# Altium PCB senkron_buck.PcbDoc (part 1 of 3)
Units mm, origin at the board's own origin, x right, y up, seen from the top; angles counter-clockwise.
Board outline 100 x 70 mm, 4 copper layers (Top Layer, L2_GND, L3_PWR, Bottom Layer), stack 1.586 mm thick; 52 components, 27 nets, 143 pads, 815 vias.
Unrouted connection lines stored in the file: 34.
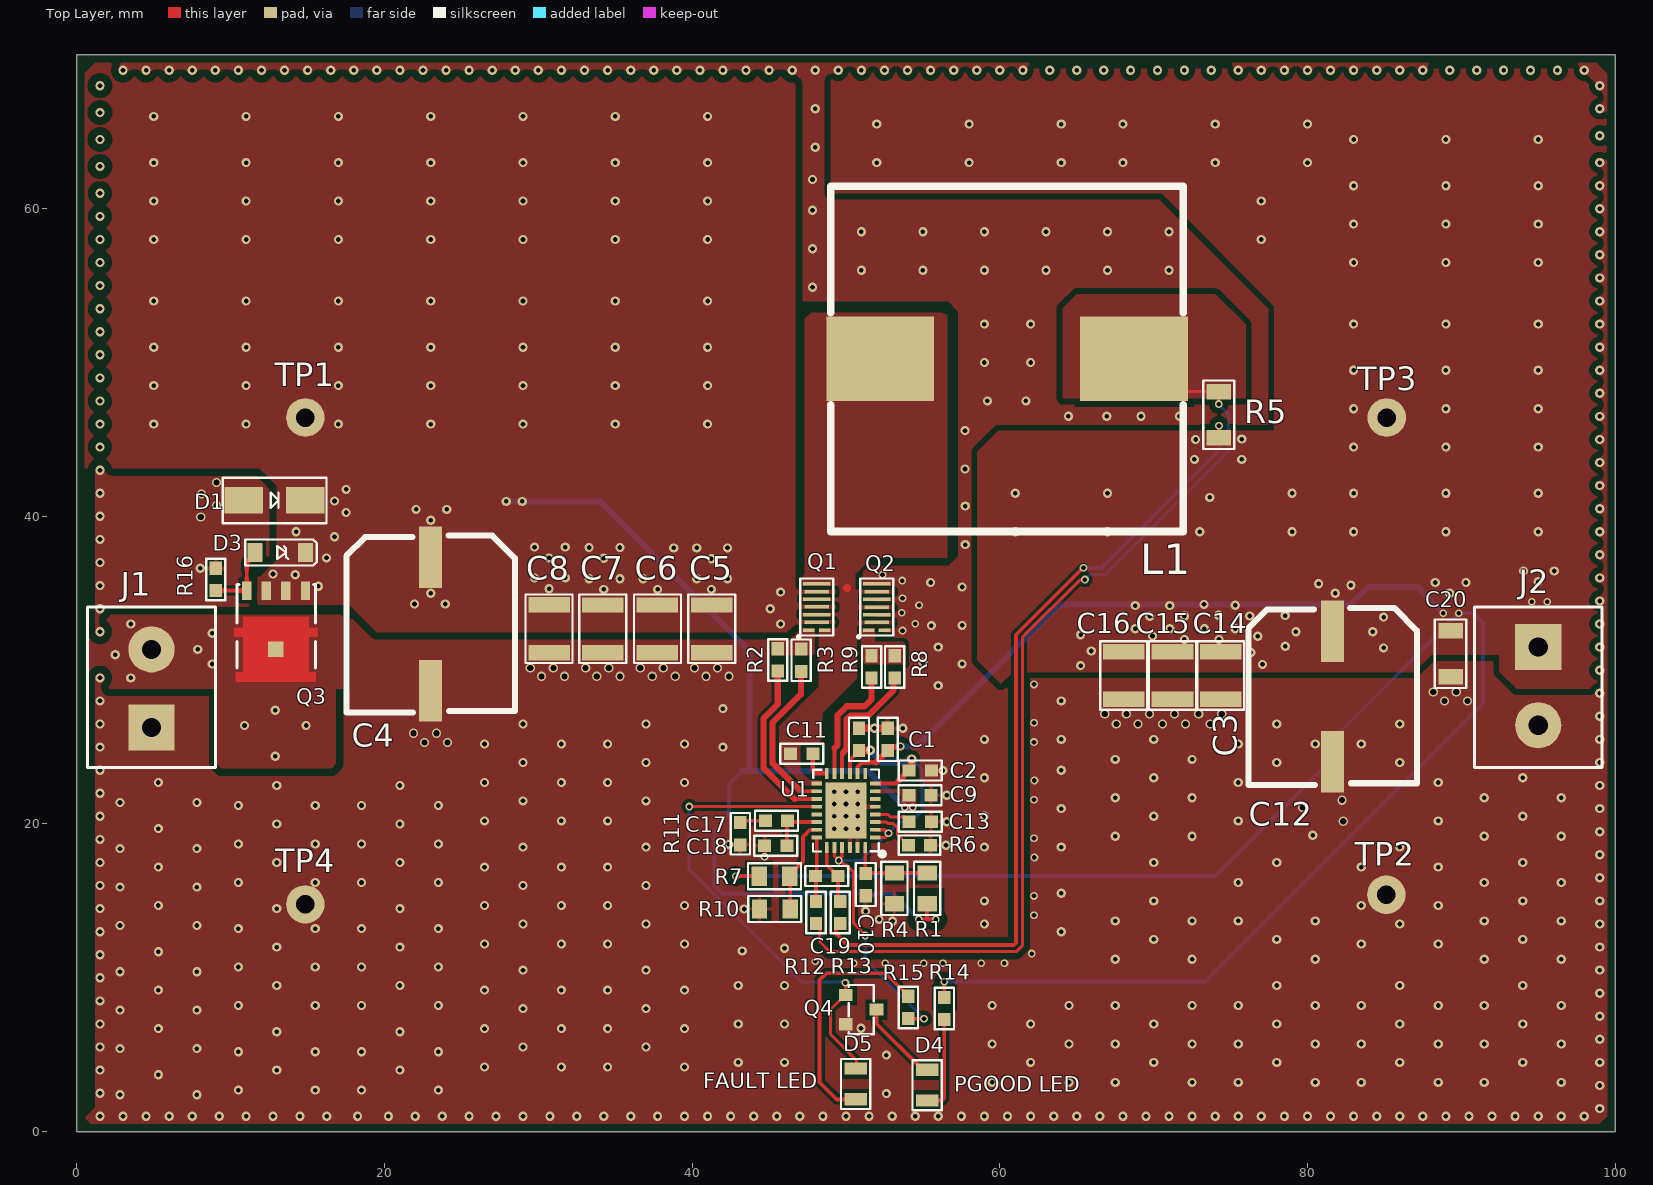
[diagram p0: Top Layer view]
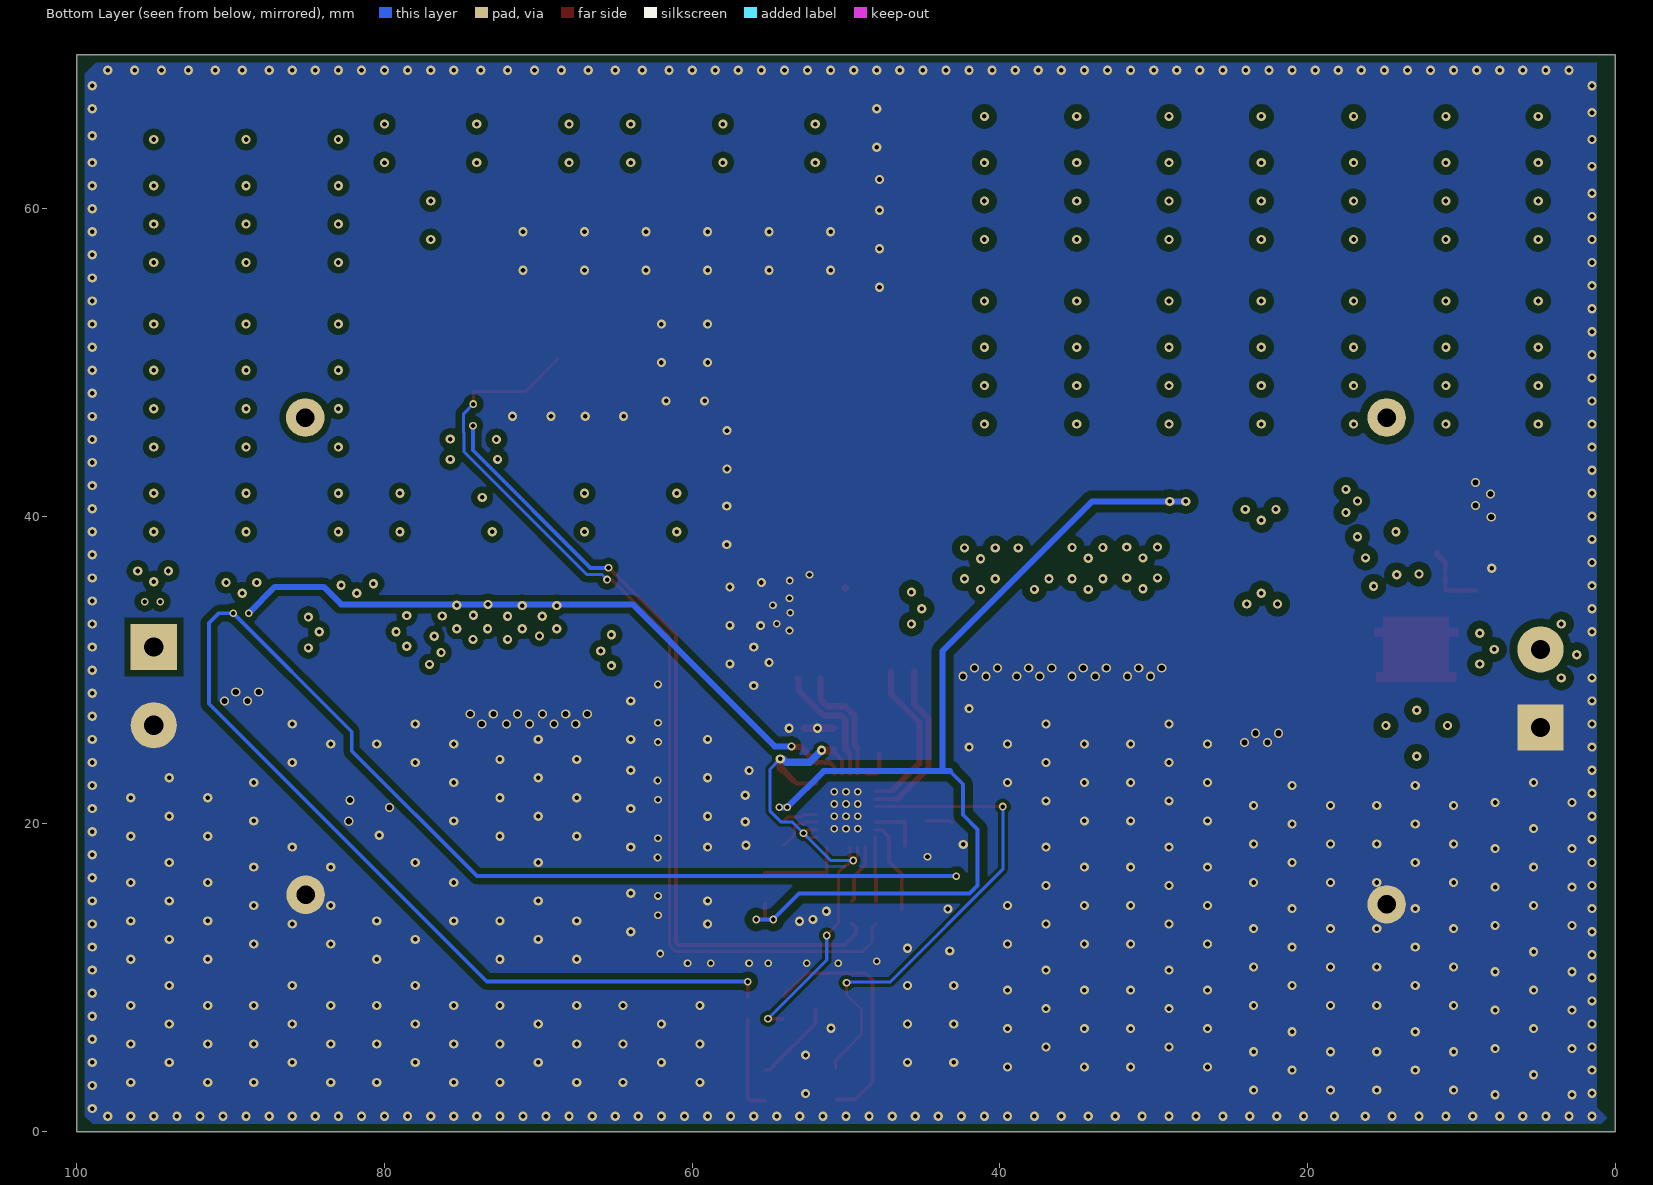
[diagram p1: Bottom Layer view, seen from below]
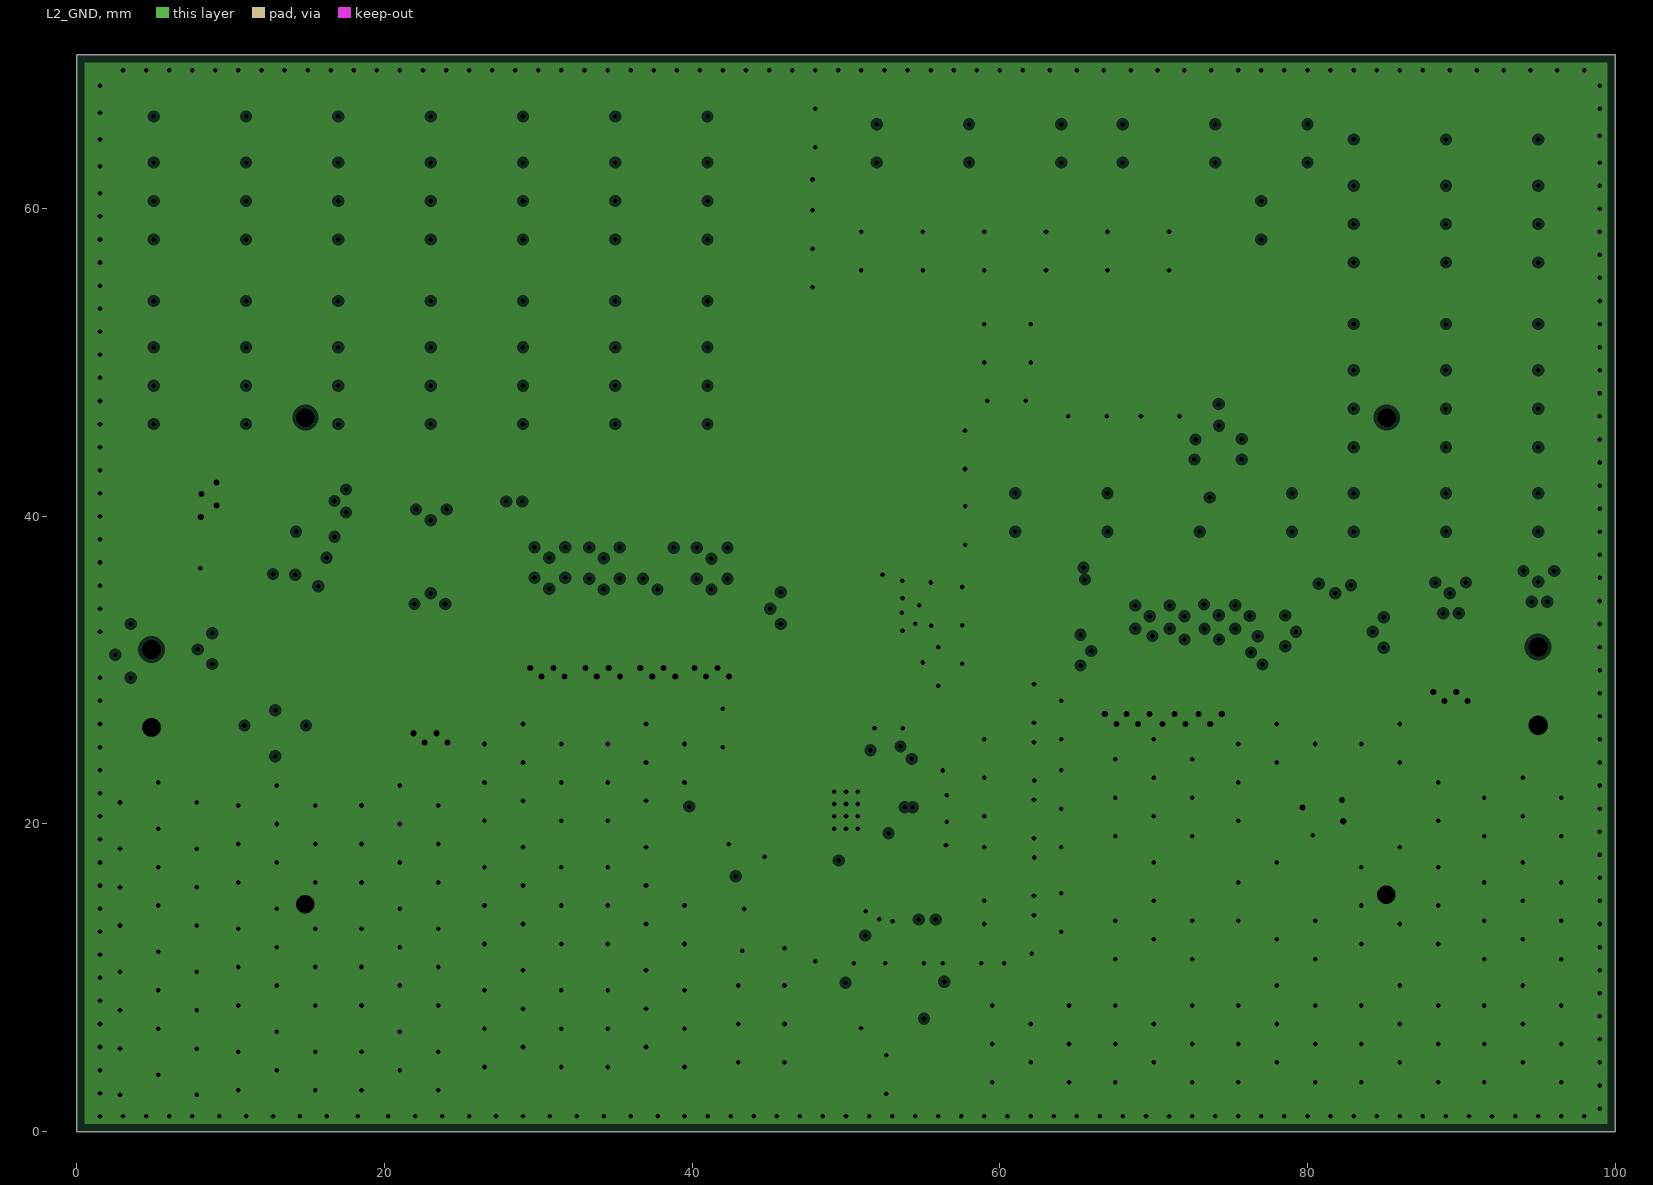
[diagram p2: L2_GND, clearances drawn from the general rule]
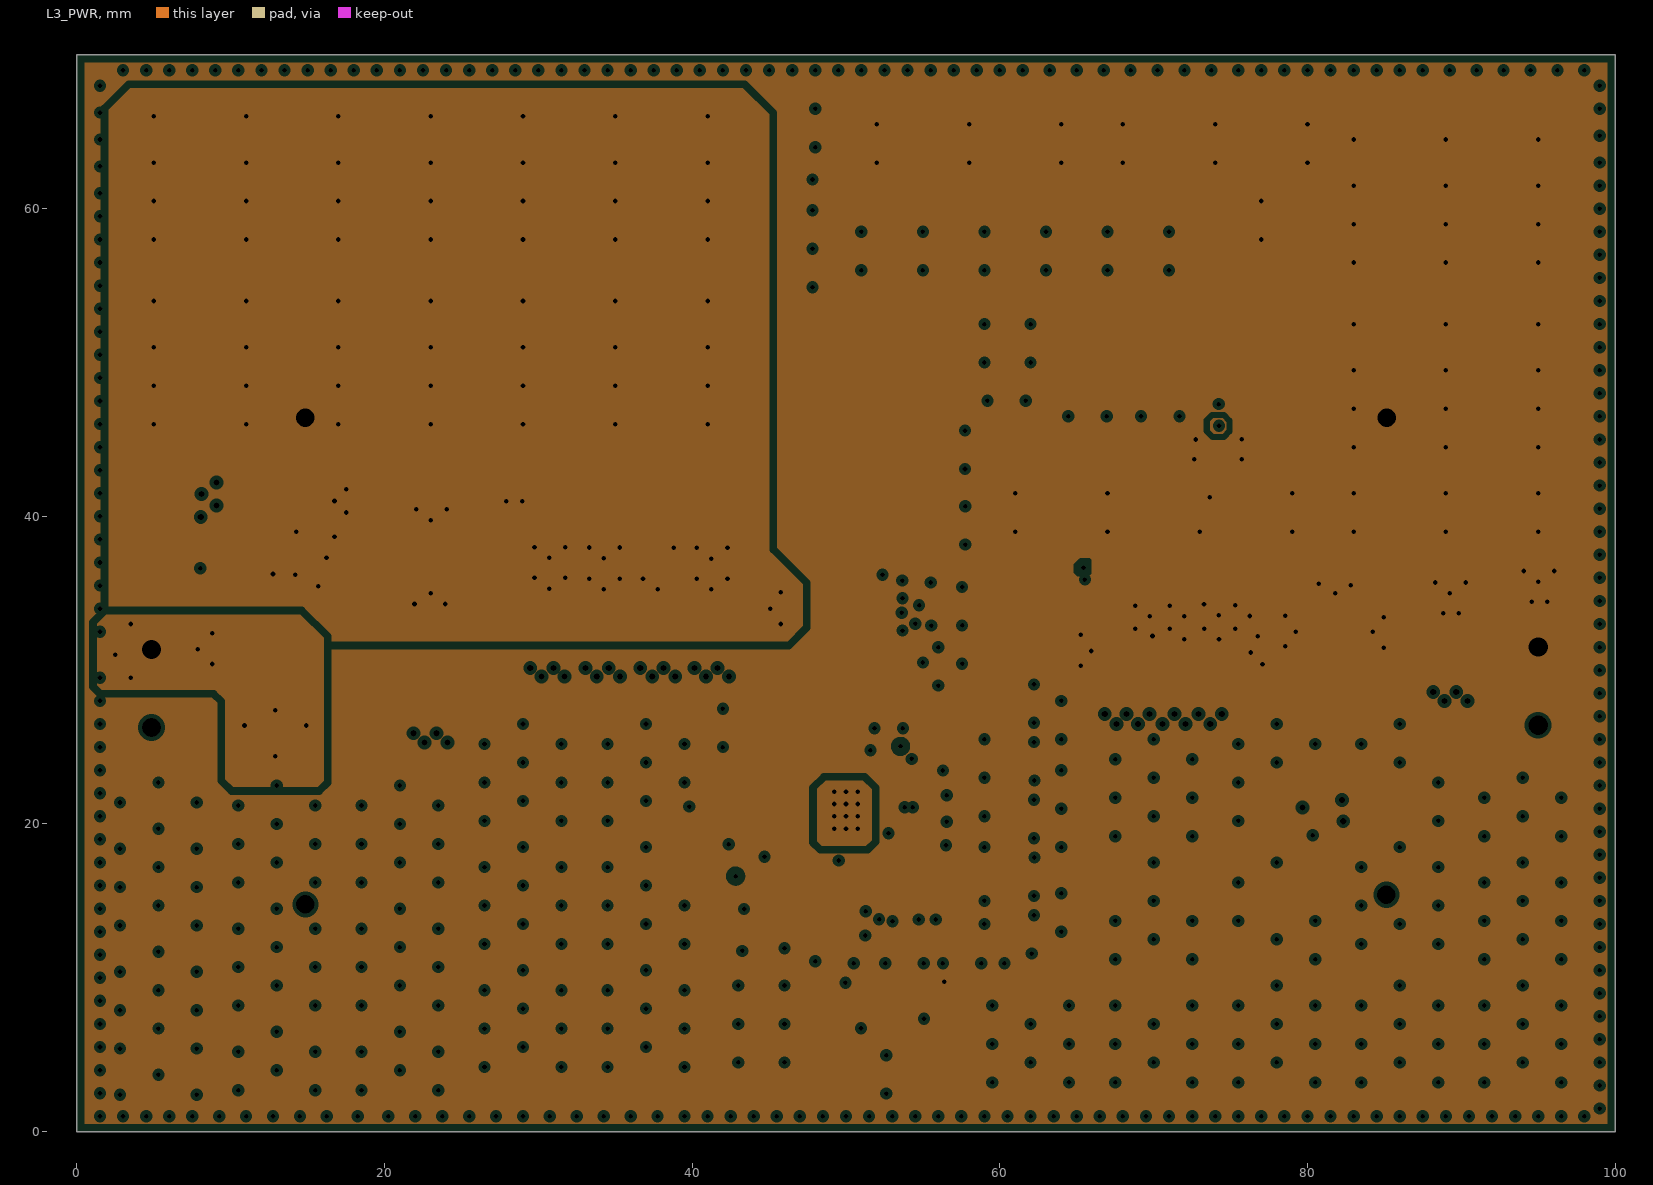
[diagram p3: L3_PWR, clearances drawn from the general rule]
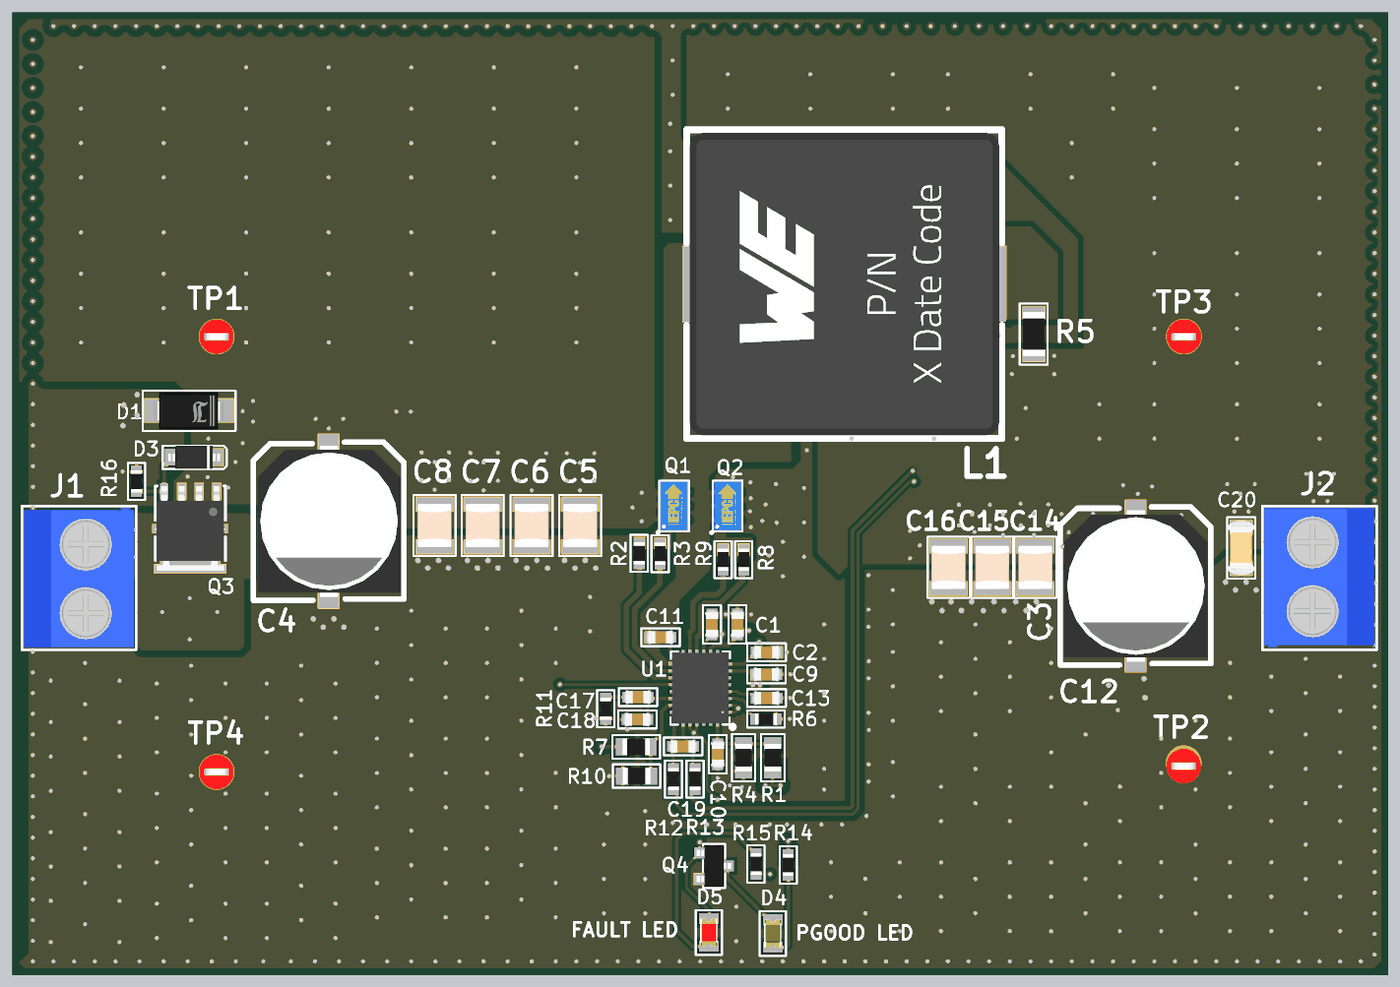
[diagram p4: 3D render of the assembled board from above, using the file's embedded part models]

## Layer stack, top to bottom
Top Solder: solder mask 0.0102, Solder Resist, Dk 3.5
Top Layer: signal copper 0.035
Dielectric 2: prepreg 0.2104, PP-006, Dk 4.1
L2_GND: plane copper 0.0152, net GND
Dielectric 1: dielectric 1.065, FR-4, Dk 4.8
L3_PWR: plane copper 0.0152, net VOUT
Dielectric 3: prepreg 0.2104, PP-006, Dk 4.1
Bottom Layer: signal copper 0.035
Bottom Solder: solder mask 0.0102, Solder Resist, Dk 3.5

## Board outline
0,0 100,0 100,70 0,70

## Design rules (kind name [scope] priority, off if disabled: settings)
BoardOutlineClearance [All] p1: gap=0.5 ignorepadtopadclearanceinfootprint=FALSE
Clearance ClearanceNETL1_2-GND [InNet('NetL1_2') vs InNet('GND')] p1: gap=0.4 ignorepadtopadclearanceinfootprint=TRUE except(0: Arc-Hole Track-Hole SMDPad-Hole THPad-Hole Via-Hole Fill-Hole Poly-Hole Region-Hole Text-Hole)
Clearance ClearanceVOUT_GND [InNet('VOUT') vs InNet('GND')] p2: gap=0.4 ignorepadtopadclearanceinfootprint=TRUE except(0: Arc-Hole Track-Hole SMDPad-Hole THPad-Hole Via-Hole Fill-Hole Poly-Hole Region-Hole Text-Hole)
Clearance ClearanceVBAT_GND [InNet('VBAT') vs InNet('GND')] p3: gap=0.5 ignorepadtopadclearanceinfootprint=TRUE except(0: Arc-Hole Track-Hole SMDPad-Hole THPad-Hole Via-Hole Fill-Hole Poly-Hole Region-Hole Text-Hole)
Clearance ClearanceVIN_GND [InNet('GND') vs InNet('VIN')] p4: gap=0.5 ignorepadtopadclearanceinfootprint=TRUE except(0: Arc-Hole Track-Hole SMDPad-Hole THPad-Hole Via-Hole Fill-Hole Poly-Hole Region-Hole Text-Hole)
Clearance Clearance_1 [All] p5: gap=0.254 ignorepadtopadclearanceinfootprint=TRUE except(0: Arc-Hole Track-Hole SMDPad-Hole THPad-Hole Via-Hole Fill-Hole Poly-Hole Region-Hole Text-Hole; 0.2: Arc-Arc Arc-Track Arc-SMDPad Arc-Fill Arc-Poly Arc-Region Track-Track Track-SMDPad Track-Fill Track-Poly Track-Region)
DiffPairsRouting [All] p1: maxlimit=0.254 minlimit=0.15 mostfreqgap=0.15 toplayer_minwidth=0.15 toplayer_maxwidth=0.5 toplayer_prefwidth=0.2 bottomlayer_minwidth=0.15 bottomlayer_maxwidth=0.5 bottomlayer_prefwidth=0.2 maxuncoupledlength=12.7
PlaneClearance [All] p1: clearance=0.25
PlaneConnect [All] p1: planeconnectstyle=Direct reliefexpansion=0.508 reliefentries=4 reliefconductorwidth=0.254 reliefairgap=0.254
PolygonConnect [All] p1: connectstyle=Direct reliefconductorwidth=0.254 reliefentries=4 polygonreliefangle="90 Angle" airgapwidth=0.254
RoutingVias [All] p1: holewidth=0.3 width=0.6 viastyle="Through Hole" minholewidth=0.2 minwidth=0.45 maxholewidth=1 maxwidth=1.5
SilkToSilkClearance [All] p1: silktosilkclearance=0
SolderMaskExpansion [All] p1: expansion=0.05 istentingtop=FALSE
UnRoutedNet [All] p1: checkbadconnections=TRUE
Width [All] p1: maxlimit=10 minlimit=0.15 preferedwidth=0.254
25 further rules are at their usual default settings.

## Components (designator, comment, footprint, x,y, rotation, side; value= is the part's Value field where it differs from the comment)
C1 "1uF" "0603 CAP SER" 52.705,25.502 r0 top value=1µF
C2 "4.7uF" "0603 CAP SER" 54.825,23.475 r270 top value=4.7µF
C3 "4.7uF" "0603 CAP SER" 50.851,25.502 r0 top value=4.7µF
C4 "100uF" "CAP ELEC 12.5X10" 23,33 r270 top
C5 "4.7uF" "1210 CAP SER" 41.275,32.69 r180 top value=4.7µF
C6 "4.7uF" "1210 CAP SER" 37.744,32.69 r180 top value=4.7µF
C7 "4.7uF" "1210 CAP SER" 34.188,32.69 r180 top value=4.7µF
C8 "4.7uF" "1210 CAP SER" 30.694,32.695 r180 top value=4.7µF
C9 "100nF" "0603 CAP SER" 54.813,21.869 r270 top
C10 "100pF" "0603 CAP SER" 51.275,16.061 r180 top
C11 "100nF" "0603 CAP SER" 47.117,24.562 r270 top
C12 "220uF" "CAP ELEC 10x10" 81.636,28.296 r270 top
C13 "100nF" "0603 CAP SER" 54.825,20.147 r270 top
C14 "22uF" "1210 CAP SER" 74.35,29.65 r180 top value=22µF
C15 "22uF" "1210 CAP SER" 71.225,29.65 r180 top value=22µF
C16 "22uF" "1210 CAP SER" 68.05,29.65 r180 top value=22µF
C17 "4.7nF" "0603 CAP SER" 45.483,20.213 r90 top
C18 "100pF" "0603 CAP SER" 45.433,18.588 r90 top
C19 "1nF" "0603 CAP SER" 48.75,16.625 r270 top
C20 "10uF" "1206 CAP SER" 89.306,31.064 r180 top value=10µF
D1 "SMAJ40A-HT" "DO-214AC SMA" 12.853,41.05 r0 top
D3 "MMSZ15V-HT" SOD-123 13.213,37.65 r0 top
D4 "LED SMD 0805 GREEN 18-45mcd 140° WATER CLEAR" "LED 0805 GREEN" 55.275,3.025 r180 top
D5 "LED SMD 0805 RED 45~112mcd 120C" "LED 0805 RED" 50.625,3.1 r180 top
J1 "2P Screw Terminal Block 2 pin" "2P Screw Terminal Block 2 pin" 4.85,28.81 r270 top
J2 "2P Screw Terminal Block 2 pin" "2P Screw Terminal Block 2 pin" 95,28.96 r90 top
L1 "10 µH Shielded Drum Core, Wirewound Inductor 21 A 3.4mOhm Nonstandard" "74435581000 INDUCTOR" 60.477,50.241 r90 top value=10µH
Q1 "EPC2218" EPC2218 48.1,34.11 r90 top
Q2 "EPC2218" EPC2218 51.994,34.104 r90 top
Q3 "MOSFET DIS.52A 60V P-CH POWERPAKSO-8" "PowerPAK® SO-8L SINGLE" 12.95,33.263 r180 top
Q4 "PJA3416AE_R1_00001" "SOT-23 MOSFET" 50.987,7.935 r270 top
R1 "412k" "0805 RES" 55.275,15.811 r0 top
R2 "2.2R" "0603 RES" 45.561,30.666 r180 top value=2.2Ω
R3 "1R" "0603 RES" 47.086,30.641 r180 top value=1Ω
R4 "33.2k" "0805 RES" 53.15,15.811 r180 top value=33.2kΩ
R5 "6m" "1206 RES" 74.244,46.609 r0 top
R6 "73.2k" "0603 RES" 54.775,18.622 r270 top
R7 "604k" "0805 RES" 45.35,16.6 r270 top
R8 "1R" "0603 RES" 53.162,30.211 r180 top value=1Ω
R9 "1R" "0603 RES" 51.662,30.211 r180 top value=1Ω
R10 "43.2k" "0805 RES" 45.375,14.475 r90 top value=43.2kΩ
R11 "10k" "0603 RES" 43.133,19.363 r180 top value=10kΩ
R12 "47R" "0603 RES" 48.05,14.25 r0 top value=47Ω
R13 "47R" "0603 RES" 49.625,14.25 r0 top value=47Ω
R14 "2.2k" "0603 RES" 56.391,8.007 r180 top value=2.2kΩ
R15 "1k ohm" "0603 RES" 54.051,8.077 r0 top value=1kR
R16 "100k" "0603 RES" 9.028,35.9 r0 top value=100kR
TP1 "Test Point" "Test Point THT"#1 14.855,46.425 r0 top
TP2 "Test Point" "Test Point THT"#2 85.13,15.2 r0 top
TP3 "Test Point" "Test Point THT"#3 85.15,46.425 r0 top
TP4 "Test Point" "Test Point THT"#3 14.853,14.775 r0 top
U1 "LTC7891" "28-Lead Plastic Side Wettable QFN (4mm × 5mm)" 50,20.875 r90 top

## Footprints (in the part's own frame and the unit in brackets; to place one, negate y for a bottom-side part, rotate by r counter-clockwise, add the part's x,y. Pads: shape width x height; smd on the part's side, far side on the other; paste and mask are expansions set on the pad)
"2P Screw Terminal Block 2 pin" [mm]
  rect 3x3 hole 1.25 mask+0.05: 1(2.54,0)
  round 3 hole 1.25 mask+0.05: 2(-2.54,0)
  silkscreen extent -5.3,-4.15 5.15,4.15, body extent -5.15,-4 5,4, height 10.05
"28-Lead Plastic Side Wettable QFN (4mm × 5mm)" [mm]
  rect 0.25x0.7 smd mask+0.05: 1(-1.75,-1.9) 2(-1.25,-1.9) 3(-0.75,-1.9) 4(-0.25,-1.9) 5(0.25,-1.9) 6(0.75,-1.9) 7(1.25,-1.9) 8(1.75,-1.9) 15(1.75,1.9) 16(1.25,1.9) 17(0.75,1.9) 18(0.25,1.9) 19(-0.25,1.9) 20(-0.75,1.9) 21(-1.25,1.9) 22(-1.75,1.9)
  rect 0.7x0.25 smd mask+0.05: 9(2.4,-1.25) 10(2.4,-0.75) 11(2.4,-0.25) 12(2.4,0.25) 13(2.4,0.75) 14(2.4,1.25) 23(-2.4,1.25) 24(-2.4,0.75) 25(-2.4,0.25) 26(-2.4,-0.25) 27(-2.4,-0.75) 28(-2.4,-1.25)
  rect 3.65x2.65 smd mask+0.05: 29(0,0)
  silkscreen extent -2.97,-2.5 2.66,2.15, body extent -2.55,-2.04 2.55,2.04, height 0.81
"0603 CAP SER" [mm]
  rect 0.8x0.85 smd mask+0.05: 1(0,0.725) 2(0,-0.725)
  silkscreen extent -0.65,-1.4 0.65,1.4, body extent -0.51,-1.05 0.51,1.05, height 0.84
"0603 RES" [mm]
  rect 0.8x0.85 smd mask+0.05: 1(0,0.725) 2(0,-0.725)
  silkscreen extent -0.63,-1.35 0.63,1.35, body extent -0.4,-0.8 0.4,0.8, height 0.45
"0805 RES" [mm]
  rect 1.25x1 smd mask+0.05: 1(0,1) 2(0,-1)
  silkscreen extent -0.85,-1.73 0.85,1.73, body extent -0.6,-1 0.6,1, height 0.55
"1206 CAP SER" [mm]
  rect 1.6x1 smd mask+0.05: 1(0,1.5) 2(0,-1.5)
  silkscreen extent -1.02,-2.22 1.02,2.22, body extent -0.98,-1.97 0.98,1.97, height 1.4
"1206 RES" [mm]
  rect 1.6x1 smd mask+0.05: 1(0,1.5) 2(0,-1.5)
  silkscreen extent -1.02,-2.22 1,2.22, body extent -0.8,-1.6 0.8,1.6, height 0.5
"1210 CAP SER" [mm]
  rect 2.7x1 smd mask+0.05: 1(0,1.55) 2(0,-1.55)
  silkscreen extent -1.53,-2.22 1.53,2.22, body extent -1.25,-1.6 1.25,1.6, height 2.51
"74435581000 INDUCTOR" [mm]
  rect 5.5x7 smd mask+0.05: 1(0,8.25) 2(0,-8.25)
  silkscreen extent -11.22,-11.45 11.22,11.48, body extent -11,-11.25 11,11.25, height 12
"CAP ELEC 10x10" [mm]
  rect 4x1.5 smd mask+0.05: 1(-4.25,0) 2(4.25,0)
  silkscreen extent -5.75,-5.48 5.75,5.48, body extent -5.5,-5.17 5.5,5.23, height 10.41
"CAP ELEC 12.5X10" [mm]
  rect 4x1.5 smd mask+0.05: 1(-4.35,0) 2(4.35,0)
  silkscreen extent -5.75,-5.48 5.75,5.48, body extent -5.5,-5.17 5.5,5.23, height 10.41
"DO-214AC SMA" [mm] "DO-214AC SMA"
  rect 2.5x1.7 smd mask+0.05: A(-2,0) K(2,0)
  silkscreen extent -3.37,-1.5 3.37,1.45, body extent -2.58,-1.38 2.53,1.32, height 1.96
EPC2218 [mm]
  rect 0.23x0.755 smd mask+0.05: 1(-1.5,0.513) 2(-1.5,-0.512)
  rect 0.23x1.605 smd mask+0.05: 3(-1,0) 5(0,0) 7(1,0)
  rect 0.23x1.78 smd mask+0.05: 4(-0.5,0) 6(0.5,0) 8(1.5,0)
  silkscreen extent -1.98,-1.07 1.85,1.21, body extent -1.75,-0.97 1.75,0.97, height 0.65
"LED 0805 GREEN" [mm]
  rect 1.45x0.8 smd mask+0.05: 1(0,1) 2(0,-1)
  silkscreen extent -0.95,-1.63 0.95,1.63, body extent -0.63,-1.01 0.63,1.01, height 1.1
"LED 0805 RED" [mm]
  rect 1.45x0.8 smd mask+0.05: 1(0,1) 2(0,-1)
  silkscreen extent -0.95,-1.63 0.95,1.63, body extent -0.63,-1.01 0.63,1.01, height 1.1
"PowerPAK® SO-8L SINGLE" [mm]
  rect 1x1 smd mask+0.05: D(0.025,1.913)
  rect 0.6x1.2 smd mask+0.05: G(1.905,-1.912) S(-1.905,-1.912) S(-0.635,-1.912) S(0.635,-1.912)
  Top Layer region: -2.125,-0.212 2.15,-0.212 2.15,0.5 2.75,0.5 2.75,1.1 2.15,1.1 2.15,3.413 2.625,3.413 2.625,4.013 -2.575,4.013 -2.575,3.413 -2.125,3.413 -2.125,1.1 -2.7,1.1 -2.7,0.5 -2.125,0.5
  silkscreen extent -2.55,-2.3 2.55,3.13, body extent -2.56,-2.29 2.56,3.86, height 1.07
SOD-123 [mm]
  rect 0.97x1.22 smd mask+0.05: A(-1.64,0) K(1.64,0)
  silkscreen extent -2.27,-0.85 2.37,0.85, body extent -1.88,-0.85 1.88,0.85, height 1.2
"SOT-23 MOSFET" [mm]
  rect 0.8x0.9 smd mask+0.05: D(0,1) G(-0.95,-1) S(0.95,-1)
  silkscreen extent -1.6,-0.8 1.6,0.82, body extent -1.5,-1.25 1.5,1.25, height 1.1
"Test Point THT"#1 [mm]
  round 2.5 hole 1.2 mask+0.05: 1(-0.002,0)
  body extent -1.26,-1.27 1.26,1.27, height 5.07
"Test Point THT"#2 [mm]
  round 2.5 hole 1.2 mask+0.05: 1(0,0.2)
  body extent -1.26,-1.27 1.26,1.27, height 5.07
"Test Point THT"#3 [mm]
  round 2.5 hole 1.2 mask+0.05: 1(0,0)
  body extent -1.26,-1.27 1.26,1.27, height 5.07

## Part data
C1: library part "Cap Cer 1uF %10  SMD 0603", "Multi Layer Ceramic Capacitor (MLCC)", Case Code (Metric)=1608, Case Code (Imperial)=0603, Dielectric=X7R, Dielectric Material=Ceramic, Manufacturer="Samsung Electro-Mechanics", Manufacturer Part Number=CL10B105KA8NNNC, Max Operating Temperature=125°C, Min Operating Temperature=-55°C, Supplier Part Number=187-CL10B105KA8NNNC, Tolerance=10%, Voltage=25V, Case/Package=0603, Category="Ceramic Capacitors", China RoHS=Compliant, ComponentLink1Description=https://datasheet.octopart.com:443/CL10B105KA8NNNC-Samsung-Electro-Mechanics-datasheet-182019882.pdf?src-supplier=IHS, ComponentLink1URL=https://datasheet.octopart.com:443/CL10B105KA8NNNC-Samsung-Electro-Mechanics-datasheet-182019882.pdf?src-supplier=IHS, ComponentLink2Description=https://datasheet.octopart.com:443/CL10B105KA8NNNC-Samsung-Electro-Mechanics-datasheet-106547815.pdf?src-supplier=Upverter, ComponentLink2URL=https://datasheet.octopart.com:443/CL10B105KA8NNNC-Samsung-Electro-Mechanics-datasheet-106547815.pdf?src-supplier=Upverter, ComponentLink3Description=https://datasheet.octopart.com:443/CL10B105KA8NNNC-Samsung-Electro-Mechanics-datasheet-137699931.pdf?src-supplier=Samsung+SCT, ComponentLink3URL=https://datasheet.octopart.com:443/CL10B105KA8NNNC-Samsung-Electro-Mechanics-datasheet-137699931.pdf?src-supplier=Samsung+SCT, ComponentLink4Description=https://datasheet.octopart.com:443/CL10B105KA8NNNC-Samsung-Electro-Mechanics-datasheet-116890983.pdf?src-supplier=Future+Electronics, ComponentLink4URL=https://datasheet.octopart.com:443/CL10B105KA8NNNC-Samsung-Electro-Mechanics-datasheet-116890983.pdf?src-supplier=Future+Electronics, ComponentLink5Description=https://datasheet.octopart.com:443/CL10B105KA8NNNC-Samsung-datasheet-12527851.pdf?src-supplier=Future+Electronics, ComponentLink5URL=https://datasheet.octopart.com:443/CL10B105KA8NNNC-Samsung-datasheet-12527851.pdf?src-supplier=Future+Electronics, ComponentLink6Description=https://datasheet.octopart.com:443/CL10B105KA8NNNC-Samsung-datasheet-26669022.pdf?src-supplier=Future+Electronics, ComponentLink6URL=https://datasheet.octopart.com:443/CL10B105KA8NNNC-Samsung-datasheet-26669022.pdf?src-supplier=Future+Electronics, ComponentLink7Description=https://datasheet.octopart.com:443/CL10B105KA8NNNC-Samsung-Electro-Mechanics-datasheet-149136795.pdf?src-supplier=Future+Electronics, ComponentLink7URL=https://datasheet.octopart.com:443/CL10B105KA8NNNC-Samsung-Electro-Mechanics-datasheet-149136795.pdf?src-supplier=Future+Electronics, ComponentLink8Description=https://datasheet.octopart.com:443/CL10B105KA8NNNC-Samsung-datasheet-37081328.pdf?src-supplier=Future+Electronics, ComponentLink8URL=https://datasheet.octopart.com:443/CL10B105KA8NNNC-Samsung-datasheet-37081328.pdf?src-supplier=Future+Electronics, ComponentLink9Description=https://datasheet.octopart.com/CL10B105KA8NNNC-Samsung-Electro-Mechanics-datasheet-97040617.pdf, ComponentLink9URL=https://datasheet.octopart.com/CL10B105KA8NNNC-Samsung-Electro-Mechanics-datasheet-97040617.pdf, ComponentLink10Description=https://datasheet.octopart.com/CL10B105KA8NNNC-Samsung-Electro-Mechanics-datasheet-8324245.pdf, ComponentLink10URL=https://datasheet.octopart.com/CL10B105KA8NNNC-Samsung-Electro-Mechanics-datasheet-8324245.pdf, ComponentLink11Description=https://datasheet.octopart.com:443/CL10B105KA8NNNC-Samsung-datasheet-59220082.pdf?src-supplier=TME, ComponentLink11URL=https://datasheet.octopart.com:443/CL10B105KA8NNNC-Samsung-datasheet-59220082.pdf?src-supplier=TME, ComponentLink12Description=https://datasheet.octopart.com:443/CL10B105KA8NNNC-Samsung-Electro-Mechanics-datasheet-11897796.pdf?src-supplier=Arrow+Electronics, ComponentLink12URL=https://datasheet.octopart.com:443/CL10B105KA8NNNC-Samsung-Electro-Mechanics-datasheet-11897796.pdf?src-supplier=Arrow+Electronics, ComponentLink13Description=Tedarikçi, ComponentLink13URL=https://www.ozdisan.com/p/smt-smd-ve-mlcc-kapasitorler-184/samsung-cl10b105ka8nnnc-439262, Contact Plating=Tin, Depth=800µm, Height=900µm, Length=1.6mm, Lifecycle Status=Production, Material=Ceramic, Mounting Technology="Surface Mount", Number of Terminals=2, Pricing="1=0,1, 10=0,007, 50=0,007, 100=0,007, 1000=0,007, 10000=0,006 (USD)", Radiation Hardening=No, REACH SVHC=Yes, RoHS=Compliant, Schedule B="8532240020, 8532240020|8532240020, 8532240020|8532240020|8532240020, 8532240020|8532240020|8532240020|8532240020", Stock=1751637, Supplier=Mouser, Thickness=889µm, Voltage Rating=25V, Voltage Rating (DC)=25V, Width=800µm
C2 C3: library part "Cap Cer 4.7uF %10 SMD 0603", "Ceramic Capacitor, Multilayer, Ceramic, 16V, 10% +Tol, 10% -Tol, X5R, +-15% TC, 4.7uF, Surface Mount, 0603 inch", Case Code (Metric)=1608, Case Code (Imperial)=0603, Dielectric=X5R, Dielectric Material=Ceramic, Manufacturer="Samsung Electro-Mechanics", Manufacturer Part Number=CL10A475KO8NNNC, Max Operating Temperature=85°C, Min Operating Temperature=-55°C, Supplier Part Number=187-CL10A475KO8NNNC, Tolerance=10%, Voltage=16V, Case/Package=0603, Category="Ceramic Capacitors", China RoHS=Compliant, ComponentLink1Description=https://datasheet.octopart.com:443/CL10A475KO8NNNC-Samsung-Electro-Mechanics-datasheet-136031787.pdf?src-supplier=IHS, ComponentLink1URL=https://datasheet.octopart.com:443/CL10A475KO8NNNC-Samsung-Electro-Mechanics-datasheet-136031787.pdf?src-supplier=IHS, ComponentLink2Description=https://datasheet.octopart.com:443/CL10A475KO8NNNC-Samsung-Electro-Mechanics-datasheet-81461811.pdf?src-supplier=Upverter, ComponentLink2URL=https://datasheet.octopart.com:443/CL10A475KO8NNNC-Samsung-Electro-Mechanics-datasheet-81461811.pdf?src-supplier=Upverter, ComponentLink3Description=https://datasheet.octopart.com/CL10A475KO8NNNC-Samsung-Electro-Mechanics-datasheet-8324245.pdf, ComponentLink3URL=https://datasheet.octopart.com/CL10A475KO8NNNC-Samsung-Electro-Mechanics-datasheet-8324245.pdf, ComponentLink4Description=https://datasheet.octopart.com/CL10A475KO8NNNC-Samsung-Electro-Mechanics-datasheet-97040617.pdf, ComponentLink4URL=https://datasheet.octopart.com/CL10A475KO8NNNC-Samsung-Electro-Mechanics-datasheet-97040617.pdf, ComponentLink5Description=https://datasheet.octopart.com/General-Multilayer-Ceramic-Capacitors-Samsung-datasheet-family-111.pdf, ComponentLink5URL=https://datasheet.octopart.com/General-Multilayer-Ceramic-Capacitors-Samsung-datasheet-family-111.pdf, ComponentLink6Description=https://datasheet.octopart.com:443/CL10A475KO8NNNC-Samsung-Electro-Mechanics-datasheet-110226305.pdf?src-supplier=Future+Electronics, ComponentLink6URL=https://datasheet.octopart.com:443/CL10A475KO8NNNC-Samsung-Electro-Mechanics-datasheet-110226305.pdf?src-supplier=Future+Electronics, ComponentLink7Description=https://datasheet.octopart.com:443/CL10A475KO8NNNC-Samsung-datasheet-44382858.pdf?src-supplier=Future+Electronics, ComponentLink7URL=https://datasheet.octopart.com:443/CL10A475KO8NNNC-Samsung-datasheet-44382858.pdf?src-supplier=Future+Electronics, ComponentLink8Description=https://datasheet.octopart.com:443/CL10A475KO8NNNC-Samsung-datasheet-12513645.pdf?src-supplier=Future+Electronics, ComponentLink8URL=https://datasheet.octopart.com:443/CL10A475KO8NNNC-Samsung-datasheet-12513645.pdf?src-supplier=Future+Electronics, ComponentLink9Description=https://datasheet.octopart.com:443/CL10A475KO8NNNC-Samsung-datasheet-26589133.pdf?src-supplier=Future+Electronics, ComponentLink9URL=https://datasheet.octopart.com:443/CL10A475KO8NNNC-Samsung-datasheet-26589133.pdf?src-supplier=Future+Electronics, ComponentLink10Description=https://datasheet.octopart.com:443/CL10A475KO8NNNC-Samsung-datasheet-11541288.pdf?src-supplier=Future+Electronics, ComponentLink10URL=https://datasheet.octopart.com:443/CL10A475KO8NNNC-Samsung-datasheet-11541288.pdf?src-supplier=Future+Electronics, ComponentLink11Description=https://datasheet.octopart.com:443/CL10A475KO8NNNC-Samsung-Electro-Mechanics-datasheet-149158806.pdf?src-supplier=Future+Electronics, ComponentLink11URL=https://datasheet.octopart.com:443/CL10A475KO8NNNC-Samsung-Electro-Mechanics-datasheet-149158806.pdf?src-supplier=Future+Electronics, ComponentLink12Description=https://datasheet.octopart.com:443/CL10A475KO8NNNC-Samsung-Electro-Mechanics-datasheet-11892693.pdf?src-supplier=Arrow+Electronics, ComponentLink12URL=https://datasheet.octopart.com:443/CL10A475KO8NNNC-Samsung-Electro-Mechanics-datasheet-11892693.pdf?src-supplier=Arrow+Electronics, ComponentLink13Description=https://datasheet.octopart.com:443/CL10A475KO8NNNC-Samsung-datasheet-59220082.pdf?src-supplier=TME, ComponentLink13URL=https://datasheet.octopart.com:443/CL10A475KO8NNNC-Samsung-datasheet-59220082.pdf?src-supplier=TME, ComponentLink14Description=http://sigma.octopart.com:80/rohs_certificate/General-Multilayer-Ceramic-Capacitors-Samsung-family-110.pdf?src-supplier=Compliance+Statements, ComponentLink14URL=http://sigma.octopart.com:80/rohs_certificate/General-Multilayer-Ceramic-Capacitors-Samsung-family-110.pdf?src-supplier=Compliance+Statements, ComponentLink15Description=http://sigma.octopart.com:80/rohs_statement/General-Multilayer-Ceramic-Capacitors-Samsung-family-132.pdf?src-supplier=Compliance+Statements, ComponentLink15URL=http://sigma.octopart.com:80/rohs_statement/General-Multilayer-Ceramic-Capacitors-Samsung-family-132.pdf?src-supplier=Compliance+Statements, ComponentLink16Description=http://sigma.octopart.com:80/reach_statement/General-Multilayer-Ceramic-Capacitors-Samsung-family-133.pdf?src-supplier=Compliance+Statements, ComponentLink16URL=http://sigma.octopart.com:80/reach_statement/General-Multilayer-Ceramic-Capacitors-Samsung-family-133.pdf?src-supplier=Compliance+Statements, ComponentLink17Description=Tedarikçi, ComponentLink17URL=https://www.ozdisan.com/p/smt-smd-ve-mlcc-kapasitorler-184/samsung-cl10a475ko8nnnc-522172, Contact Plating=Tin, Depth=800µm, Height=900µm, Length=1.6mm, Lifecycle Status=NRND, Material=Ceramic, Mounting Technology="Surface Mount", Number of Terminals=2, Pricing="1=0,1, 10=0,014, 50=0,014, 100=0,014, 1000=0,014, 10000=0,014 (USD)", Radiation Hardening=No, REACH SVHC=Yes, RoHS=Compliant, Schedule B="8532240020, 8532240020|8532240020|8532240020|8532240020|8532240020|8532240020|8532240020|8532240020|8532240020|8532240020|8532240020|8532240020|8532240020|8532240020|8532240020|8532240020|8532240020|8532240020|8532240020|8532240020|8532240020|8532240020|8532240020|85", Stock=255576, Supplier=Mouser, Thickness=889µm, Voltage Rating=16V, Voltage Rating (DC)=16V, Width=800µm
C4: library part "Cap Elec 100uF 80V SMD", "CAP.EL.100uF 80V 10x12.5 105C 2000Hrs SMD", Tolerans="±20 %", Voltaj Değeri=80VDC, ComponentLink1Description=Tedarikçi, ComponentLink1URL=https://www.ozdisan.com/p/aluminyum-kapasitorler-180/koshin-mre-080v101mg125-t-r-744332, Kapasitans=100uF, Kapasitör Tipi=Electrolytic, Montaj Tipi=SMT, Üretici Ürün Kodu=MRE-080V101MG125-T/R
C5 C6 C7 C8: library part "Cap Cer 4.7uF %10 SMD 1210", "Ceramic Capacitor, Multilayer, Ceramic, 50V, 10% +Tol, 10% -Tol, X7R, +-15% TC, 4.7uF, Surface Mount, 1210 inch", Case/Package=1210, Dielectric=X7R, Dielectric Material=Ceramic, Manufacturer="Samsung Electro-Mechanics", Manufacturer Part Number=CL32B475KBJNNNE, Max Operating Temperature=125°C, Min Operating Temperature=-55°C, Supplier Part Number=187-CL32B475KBJNNNE, Tolerance=10%, Voltage Rating=50V, Category="Ceramic Capacitors", China RoHS=Compliant, ComponentLink1Description=https://datasheet.octopart.com:443/CL32B475KBJNNNE-Samsung-Electro-Mechanics-datasheet-136482674.pdf?src-supplier=IHS, ComponentLink1URL=https://datasheet.octopart.com:443/CL32B475KBJNNNE-Samsung-Electro-Mechanics-datasheet-136482674.pdf?src-supplier=IHS, ComponentLink2Description=https://datasheet.octopart.com:443/CL32B475KBJNNNE-Samsung-Electro-Mechanics-datasheet-149049220.pdf?src-supplier=Future+Electronics, ComponentLink2URL=https://datasheet.octopart.com:443/CL32B475KBJNNNE-Samsung-Electro-Mechanics-datasheet-149049220.pdf?src-supplier=Future+Electronics, ComponentLink3Description=https://datasheet.octopart.com:443/CL32B475KBJNNNE-Samsung-Electro-Mechanics-datasheet-116120939.pdf?src-supplier=Future+Electronics, ComponentLink3URL=https://datasheet.octopart.com:443/CL32B475KBJNNNE-Samsung-Electro-Mechanics-datasheet-116120939.pdf?src-supplier=Future+Electronics, ComponentLink4Description=https://datasheet.octopart.com:443/CL32B475KBJNNNE-Samsung-Electro-Mechanics-datasheet-81462655.pdf?src-supplier=Future+Electronics, ComponentLink4URL=https://datasheet.octopart.com:443/CL32B475KBJNNNE-Samsung-Electro-Mechanics-datasheet-81462655.pdf?src-supplier=Future+Electronics, ComponentLink5Description=https://datasheet.octopart.com:443/CL32B475KBJNNNE-Samsung-datasheet-66660282.pdf?src-supplier=Future+Electronics, ComponentLink5URL=https://datasheet.octopart.com:443/CL32B475KBJNNNE-Samsung-datasheet-66660282.pdf?src-supplier=Future+Electronics, ComponentLink6Description=https://datasheet.octopart.com:443/CL32B475KBJNNNE-Samsung-datasheet-58578007.pdf?src-supplier=Future+Electronics, ComponentLink6URL=https://datasheet.octopart.com:443/CL32B475KBJNNNE-Samsung-datasheet-58578007.pdf?src-supplier=Future+Electronics, ComponentLink7Description=https://datasheet.octopart.com:443/CL32B475KBJNNNE-Samsung-datasheet-37081328.pdf?src-supplier=Future+Electronics, ComponentLink7URL=https://datasheet.octopart.com:443/CL32B475KBJNNNE-Samsung-datasheet-37081328.pdf?src-supplier=Future+Electronics, ComponentLink8Description=https://datasheet.octopart.com/CL32B475KBJNNNE-Samsung-Electro-Mechanics-datasheet-97040617.pdf, ComponentLink8URL=https://datasheet.octopart.com/CL32B475KBJNNNE-Samsung-Electro-Mechanics-datasheet-97040617.pdf, ComponentLink9Description=https://datasheet.octopart.com/CL32B475KBJNNNE-Samsung-Electro-Mechanics-datasheet-8324245.pdf, ComponentLink9URL=https://datasheet.octopart.com/CL32B475KBJNNNE-Samsung-Electro-Mechanics-datasheet-8324245.pdf, ComponentLink10Description=https://datasheet.octopart.com/General-Multilayer-Ceramic-Capacitors-Samsung-datasheet-family-111.pdf, ComponentLink10URL=https://datasheet.octopart.com/General-Multilayer-Ceramic-Capacitors-Samsung-datasheet-family-111.pdf, ComponentLink11Description=http://sigma.octopart.com:80/rohs_certificate/General-Multilayer-Ceramic-Capacitors-Samsung-family-110.pdf?src-supplier=Compliance+Statements, ComponentLink11URL=http://sigma.octopart.com:80/rohs_certificate/General-Multilayer-Ceramic-Capacitors-Samsung-family-110.pdf?src-supplier=Compliance+Statements, ComponentLink12Description=http://sigma.octopart.com:80/rohs_statement/General-Multilayer-Ceramic-Capacitors-Samsung-family-132.pdf?src-supplier=Compliance+Statements, ComponentLink12URL=http://sigma.octopart.com:80/rohs_statement/General-Multilayer-Ceramic-Capacitors-Samsung-family-132.pdf?src-supplier=Compliance+Statements, ComponentLink13Description=http://sigma.octopart.com:80/reach_statement/General-Multilayer-Ceramic-Capacitors-Samsung-family-133.pdf?src-supplier=Compliance+Statements, ComponentLink13URL=http://sigma.octopart.com:80/reach_statement/General-Multilayer-Ceramic-Capacitors-Samsung-family-133.pdf?src-supplier=Compliance+Statements, ComponentLink14Description=Tedarikçi, ComponentLink14URL=https://www.ozdisan.com/p/smt-smd-ve-mlcc-kapasitorler-184/samsung-cl32b475kbjnnne-1206577, Height=2.7mm, Lead Free="Lead Free", Length=3.2mm, Lifecycle Status=Production, Material=Ceramic, Mounting Technology="Surface Mount", Number of Terminals=2, Pricing="1=0,53, 10=0,338, 50=0,338, 100=0,238, 1000=0,15, 10000=0,121 (USD)", REACH SVHC=Yes, RoHS=Compliant, Stock=29847, Supplier=Mouser, Voltage Rating (DC)=50V, Width=2.5mm
C9 C11 C13: library part "Cap Cer 0.1uF %10 SMD 0603", "Ceramic Capacitor, Multilayer, Ceramic, 50V, 5% +Tol, 5% -Tol, X7R, 15% TC, 0.1uF, Surface Mount, 0603", Capacitor Type=Ceramic, Case/Package=0603, Manufacturer=KEMET, Manufacturer Part Number=C0603C104J5RAC7867, Max Operating Temperature=125°C, Min Operating Temperature=-55°C, Package Shape=Rectangular, Package Style=SMTMeter, Rated DC Voltage (URdc)=50V, Supplier Part Number=80-C0603C104J5R, Temperature Characteristics Code=X7R, Tolerance  (fill in as +-)=5%, Category="Ceramic Capacitors", ComponentLink1Description=Datasheet, ComponentLink1URL=https://datasheet.ciiva.com:443/pdfs/VipMasterIC/IC/KEME/KEME-S-A0008991654/KEME-S-A0008991654-1.pdf?src-supplier=IHS+Markit, ComponentLink2Description=https://datasheet.ciiva.com/28645/1851736-28645621.pdf?src-supplier=Element14, ComponentLink2URL=https://datasheet.ciiva.com/28645/1851736-28645621.pdf?src-supplier=Element14, ComponentLink3Description=https://datasheet.ciiva.com/46385/1851736-46385374.pdf?src-supplier=Element14, ComponentLink3URL=https://datasheet.ciiva.com/46385/1851736-46385374.pdf?src-supplier=Element14, ComponentLink4Description=https://datasheet.ciiva.com/46424/1851736-46424174.pdf?src-supplier=Element14, ComponentLink4URL=https://datasheet.ciiva.com/46424/1851736-46424174.pdf?src-supplier=Element14, ComponentLink5Description=https://datasheet.ciiva.com/18192/getdatasheetpartid-347940-18192678.pdf?src-supplier=Verical, ComponentLink5URL=https://datasheet.ciiva.com/18192/getdatasheetpartid-347940-18192678.pdf?src-supplier=Verical, ComponentLink6Description=https://datasheet.ciiva.com/18100/getdatasheetpartid-37078-18100981.pdf?src-supplier=Verical, ComponentLink6URL=https://datasheet.ciiva.com/18100/getdatasheetpartid-37078-18100981.pdf?src-supplier=Verical, ComponentLink7Description=Supplier, ComponentLink7URL=https://www.ozdisan.com/pasif-komponentler/kapasitorler/smt-smd-ve-mlcc-kapasitorler/C0603C104J5RAC7867/610231, Designed by=Eren/Mehmet, Dielectric Material=Ceramic, Height=0.8mm, JESD-609 Code=e3, Length=1.6mm, Mounting Technology="Surface Mount", Multilayer=Yes, Packaging="Tape and Reel", Pins=2, Pricing="1=0,12, 10=0,049, 50=0,049, 100=0,029, 1000=0,027, 10000=0,01 (USD)", Reach SVHC Compliant=Yes, RoHS=Yes, RoHS Compliant=Yes, Stock=477636, Supplier=Mouser, Terminal Finish=Nickel, Termination=Wraparound, Tolerance (fill in as +-)=5%, Width=0.8mm
C10 C18: library part "Cap Cer 100pF %1 SMD 0603", "Ceramic Capacitor, Multilayer, Ceramic, 50V, 5% +Tol, 5% -Tol, C0G, 0+-30ppm/Celcius TC, 100pF, Surface Mount, 0603...", Case Code (Metric)=1608, Case Code (Imperial)=0603, Dielectric=C0G, Dielectric Material=Ceramic, Manufacturer="Samsung Electro-Mechanics", Manufacturer Part Number=CL10C101JB8NNNC, Max Operating Temperature=125°C, Min Operating Temperature=-55°C, Supplier Part Number=187-CL10C101JB8NNNC, Temperature Coefficient=30ppm/°C, Tolerance=5%, Voltage=50V, Case/Package=0603, Category="Ceramic Capacitors", China RoHS=Compliant, ComponentLink1Description=https://datasheet.octopart.com:443/CL10C101JB8NNNC-Samsung-Electro-Mechanics-datasheet-136482390.pdf?src-supplier=IHS, ComponentLink1URL=https://datasheet.octopart.com:443/CL10C101JB8NNNC-Samsung-Electro-Mechanics-datasheet-136482390.pdf?src-supplier=IHS, ComponentLink2Description=https://datasheet.octopart.com/CL10C101JB8NNNC-Samsung-Electro-Mechanics-datasheet-8324245.pdf, ComponentLink2URL=https://datasheet.octopart.com/CL10C101JB8NNNC-Samsung-Electro-Mechanics-datasheet-8324245.pdf, ComponentLink3Description=https://datasheet.octopart.com/CL10C101JB8NNNC-Samsung-Electro-Mechanics-datasheet-97040617.pdf, ComponentLink3URL=https://datasheet.octopart.com/CL10C101JB8NNNC-Samsung-Electro-Mechanics-datasheet-97040617.pdf, ComponentLink4Description=https://datasheet.octopart.com/General-Multilayer-Ceramic-Capacitors-Samsung-datasheet-family-111.pdf, ComponentLink4URL=https://datasheet.octopart.com/General-Multilayer-Ceramic-Capacitors-Samsung-datasheet-family-111.pdf, ComponentLink5Description=https://datasheet.octopart.com:443/CL10C101JB8NNNC-Samsung-Electro-Mechanics-datasheet-110326842.pdf?src-supplier=Future+Electronics, ComponentLink5URL=https://datasheet.octopart.com:443/CL10C101JB8NNNC-Samsung-Electro-Mechanics-datasheet-110326842.pdf?src-supplier=Future+Electronics, ComponentLink6Description=https://datasheet.octopart.com:443/CL10C101JB8NNNC-Samsung-Electro-Mechanics-datasheet-81461969.pdf?src-supplier=Future+Electronics, ComponentLink6URL=https://datasheet.octopart.com:443/CL10C101JB8NNNC-Samsung-Electro-Mechanics-datasheet-81461969.pdf?src-supplier=Future+Electronics, ComponentLink7Description=https://datasheet.octopart.com:443/CL10C101JB8NNNC-Samsung-datasheet-12521739.pdf?src-supplier=Future+Electronics, ComponentLink7URL=https://datasheet.octopart.com:443/CL10C101JB8NNNC-Samsung-datasheet-12521739.pdf?src-supplier=Future+Electronics, ComponentLink8Description=https://datasheet.octopart.com:443/CL10C101JB8NNNC-Samsung-datasheet-26669111.pdf?src-supplier=Future+Electronics, ComponentLink8URL=https://datasheet.octopart.com:443/CL10C101JB8NNNC-Samsung-datasheet-26669111.pdf?src-supplier=Future+Electronics, ComponentLink9Description=https://datasheet.octopart.com:443/CL10C101JB8NNNC-Samsung-datasheet-8328827.pdf?src-supplier=Future+Electronics, ComponentLink9URL=https://datasheet.octopart.com:443/CL10C101JB8NNNC-Samsung-datasheet-8328827.pdf?src-supplier=Future+Electronics, ComponentLink10Description=https://datasheet.octopart.com:443/CL10C101JB8NNNC-Samsung-Electro-Mechanics-datasheet-149154131.pdf?src-supplier=Future+Electronics, ComponentLink10URL=https://datasheet.octopart.com:443/CL10C101JB8NNNC-Samsung-Electro-Mechanics-datasheet-149154131.pdf?src-supplier=Future+Electronics, ComponentLink11Description=https://datasheet.octopart.com:443/CL10C101JB8NNNC-Samsung-datasheet-8326407.pdf?src-supplier=TME, ComponentLink11URL=https://datasheet.octopart.com:443/CL10C101JB8NNNC-Samsung-datasheet-8326407.pdf?src-supplier=TME, ComponentLink12Description=http://sigma.octopart.com:80/rohs_certificate/General-Multilayer-Ceramic-Capacitors-Samsung-family-110.pdf?src-supplier=Compliance+Statements, ComponentLink12URL=http://sigma.octopart.com:80/rohs_certificate/General-Multilayer-Ceramic-Capacitors-Samsung-family-110.pdf?src-supplier=Compliance+Statements, ComponentLink13Description=http://sigma.octopart.com:80/rohs_statement/General-Multilayer-Ceramic-Capacitors-Samsung-family-132.pdf?src-supplier=Compliance+Statements, ComponentLink13URL=http://sigma.octopart.com:80/rohs_statement/General-Multilayer-Ceramic-Capacitors-Samsung-family-132.pdf?src-supplier=Compliance+Statements, ComponentLink14Description=http://sigma.octopart.com:80/reach_statement/General-Multilayer-Ceramic-Capacitors-Samsung-family-133.pdf?src-supplier=Compliance+Statements, ComponentLink14URL=http://sigma.octopart.com:80/reach_statement/General-Multilayer-Ceramic-Capacitors-Samsung-family-133.pdf?src-supplier=Compliance+Statements, ComponentLink15Description=Tedarikçi, ComponentLink15URL=https://www.ozdisan.com/p/smt-smd-ve-mlcc-kapasitorler-184/samsung-cl10c101jb8nnnc-11970, Contact Plating=Tin, Depth=800µm, Height=900µm, Lead Free="Lead Free", Length=1.6mm, Lifecycle Status=Production, Material=Ceramic, Mounting Technology="Surface Mount", Number of Channels=1, Number of Terminals=2, Pricing="1=0,1, 10=0,04, 50=0,04, 100=0,004, 1000=0,004, 10000=0,004 (USD)", Radiation Hardening=No, REACH SVHC=Yes, RoHS=Compliant, Schedule B="8532240020, 8532240020|8532240020, 8532240020|8532240020|8532240020, 8532240020|8532240020|8532240020|8532240020", Stock=310924, Supplier=Mouser, Thickness=889µm, Voltage Rating=50V, Voltage Rating (DC)=50V, Width=800µm
C12: library part "Cap Elec 220uF %20 50V SMD", "CAP.EL.220uF 50V 10x10 105C 2000Hrs SMD", Tolerans="±20 %", Voltaj Değeri=50VDC, ComponentLink1Description=Tedarikçi, ComponentLink1URL=https://www.ozdisan.com/p/aluminyum-kapasitorler-180/koshin-mrw-050v221mg105-t-r-465905, Kapasitans=220uF, Kapasitör Tipi=Electrolytic, Montaj Tipi=SMT, Üretici Ürün Kodu=MRW-050V221MG105-T/R
C14 C15 C16: library part "Cap Cer 22uF %10 SMD 1210", "25V 22uF X7R ±10% 1210 Multilayer Ceramic Capacitors MLCC - SMD/SMT ROHS", Case Code (Metric)=3225, Case Code (Imperial)=1210, Dielectric=X7R, Dielectric Material=Ceramic, Manufacturer="Samsung Electro-Mechanics", Manufacturer Part Number=CL32B226KAJNNNE, Max Operating Temperature=125°C, Min Operating Temperature=-55°C, Supplier Part Number=187-CL32B226KAJNNNE, Tolerance=10%, Voltage Rating=25V, Case/Package=1210, Category="Ceramic Capacitors", China RoHS=Compliant, ComponentLink1Description=https://datasheet.octopart.com:443/CL32B226KAJNNNE-Samsung-Electro-Mechanics-datasheet-136482669.pdf?src-supplier=Newark, ComponentLink1URL=https://datasheet.octopart.com:443/CL32B226KAJNNNE-Samsung-Electro-Mechanics-datasheet-136482669.pdf?src-supplier=Newark, ComponentLink2Description=https://datasheet.octopart.com:443/CL32B226KAJNNNE-Samsung-Electro-Mechanics-datasheet-149049204.pdf?src-supplier=Future+Electronics, ComponentLink2URL=https://datasheet.octopart.com:443/CL32B226KAJNNNE-Samsung-Electro-Mechanics-datasheet-149049204.pdf?src-supplier=Future+Electronics, ComponentLink3Description=https://datasheet.octopart.com:443/CL32B226KAJNNNE-Samsung-Electro-Mechanics-datasheet-116051342.pdf?src-supplier=Future+Electronics, ComponentLink3URL=https://datasheet.octopart.com:443/CL32B226KAJNNNE-Samsung-Electro-Mechanics-datasheet-116051342.pdf?src-supplier=Future+Electronics, ComponentLink4Description=https://datasheet.octopart.com:443/CL32B226KAJNNNE-Samsung-Electro-Mechanics-datasheet-81462649.pdf?src-supplier=Future+Electronics, ComponentLink4URL=https://datasheet.octopart.com:443/CL32B226KAJNNNE-Samsung-Electro-Mechanics-datasheet-81462649.pdf?src-supplier=Future+Electronics, ComponentLink5Description=https://datasheet.octopart.com:443/CL32B226KAJNNNE-Samsung-datasheet-42485260.pdf?src-supplier=Future+Electronics, ComponentLink5URL=https://datasheet.octopart.com:443/CL32B226KAJNNNE-Samsung-datasheet-42485260.pdf?src-supplier=Future+Electronics, ComponentLink6Description=https://datasheet.octopart.com:443/CL32B226KAJNNNE-Samsung-datasheet-28848742.pdf?src-supplier=Future+Electronics, ComponentLink6URL=https://datasheet.octopart.com:443/CL32B226KAJNNNE-Samsung-datasheet-28848742.pdf?src-supplier=Future+Electronics, ComponentLink7Description=https://datasheet.octopart.com:443/CL32B226KAJNNNE-Samsung-datasheet-37081328.pdf?src-supplier=Future+Electronics, ComponentLink7URL=https://datasheet.octopart.com:443/CL32B226KAJNNNE-Samsung-datasheet-37081328.pdf?src-supplier=Future+Electronics, ComponentLink8Description=https://datasheet.octopart.com/CL32B226KAJNNNE-Samsung-Electro-Mechanics-datasheet-97040617.pdf, ComponentLink8URL=https://datasheet.octopart.com/CL32B226KAJNNNE-Samsung-Electro-Mechanics-datasheet-97040617.pdf, ComponentLink9Description=https://datasheet.octopart.com/CL32B226KAJNNNE-Samsung-Electro-Mechanics-datasheet-8324245.pdf, ComponentLink9URL=https://datasheet.octopart.com/CL32B226KAJNNNE-Samsung-Electro-Mechanics-datasheet-8324245.pdf, ComponentLink10Description=https://datasheet.octopart.com/General-Multilayer-Ceramic-Capacitors-Samsung-datasheet-family-111.pdf, ComponentLink10URL=https://datasheet.octopart.com/General-Multilayer-Ceramic-Capacitors-Samsung-datasheet-family-111.pdf, ComponentLink11Description=https://datasheet.octopart.com:443/CL32B226KAJNNNE-Samsung-datasheet-59220082.pdf?src-supplier=TME, ComponentLink11URL=https://datasheet.octopart.com:443/CL32B226KAJNNNE-Samsung-datasheet-59220082.pdf?src-supplier=TME, ComponentLink12Description=http://sigma.octopart.com:80/rohs_certificate/General-Multilayer-Ceramic-Capacitors-Samsung-family-110.pdf?src-supplier=Compliance+Statements, ComponentLink12URL=http://sigma.octopart.com:80/rohs_certificate/General-Multilayer-Ceramic-Capacitors-Samsung-family-110.pdf?src-supplier=Compliance+Statements, ComponentLink13Description=http://sigma.octopart.com:80/rohs_statement/General-Multilayer-Ceramic-Capacitors-Samsung-family-132.pdf?src-supplier=Compliance+Statements, ComponentLink13URL=http://sigma.octopart.com:80/rohs_statement/General-Multilayer-Ceramic-Capacitors-Samsung-family-132.pdf?src-supplier=Compliance+Statements, ComponentLink14Description=http://sigma.octopart.com:80/reach_statement/General-Multilayer-Ceramic-Capacitors-Samsung-family-133.pdf?src-supplier=Compliance+Statements, ComponentLink14URL=http://sigma.octopart.com:80/reach_statement/General-Multilayer-Ceramic-Capacitors-Samsung-family-133.pdf?src-supplier=Compliance+Statements, ComponentLink15Description=Tedarikçi, ComponentLink15URL=https://www.ozdisan.com/p/smt-smd-ve-mlcc-kapasitorler-184/samsung-cl32b226kajnnne-402056, Depth=2.5mm, Height=2.7mm, Lead Free="Lead Free", Length=3.2mm, Lifecycle Status=Production, Material=Ceramic, Mounting Technology="Surface Mount", Number of Terminals=2, Pricing="1=0,56, 10=0,26, 50=0,26, 100=0,232, 1000=0,169, 10000=0,138 (USD)", Radiation Hardening=No, REACH SVHC=Yes, RoHS=Compliant, Schedule B="8532240020, 8532240020|8532240020|8532240020|8532240020|8532240020|8532240020|8532240020|8532240020|8532240020|8532240020|8532240020|8532240020|8532240020|8532240020|8532240020|8532240020|8532240020|8532240020|8532240020|8532240020|8532240020|8532240020|8532240020|85", Stock=357816, Supplier=Mouser, Thickness=2.6924mm, Voltage Rating (DC)=25V, Width=2.5mm
C17: library part "Cap Cer 4.7nF %10 SMD 0603", "Ceramic Capacitor, Multilayer, Ceramic, 50V, 10% +Tol, 10% -Tol, X7R, +-15% TC, 4.7nF, Surface Mount, 0603 inch", Case Code (Metric)=1608, Case Code (Imperial)=0603, Dielectric=X7R, Dielectric Material=Ceramic, Manufacturer="Samsung Electro-Mechanics", Manufacturer Part Number=CL10B472KB8NNNC, Max Operating Temperature=125°C, Min Operating Temperature=-55°C, Supplier Part Number=187-CL10B472KB8NNNC, Tolerance=10%, Voltage=50V, Case/Package=0603, Category="Ceramic Capacitors", China RoHS=Compliant, ComponentLink1Description=https://datasheet.octopart.com:443/CL10B472KB8NNNC-Samsung-Electro-Mechanics-datasheet-136482355.pdf?src-supplier=IHS, ComponentLink1URL=https://datasheet.octopart.com:443/CL10B472KB8NNNC-Samsung-Electro-Mechanics-datasheet-136482355.pdf?src-supplier=IHS, ComponentLink2Description=https://datasheet.octopart.com/CL10B472KB8NNNC-Samsung-Electro-Mechanics-datasheet-8324245.pdf, ComponentLink2URL=https://datasheet.octopart.com/CL10B472KB8NNNC-Samsung-Electro-Mechanics-datasheet-8324245.pdf, ComponentLink3Description=https://datasheet.octopart.com/CL10B472KB8NNNC-Samsung-Electro-Mechanics-datasheet-97040617.pdf, ComponentLink3URL=https://datasheet.octopart.com/CL10B472KB8NNNC-Samsung-Electro-Mechanics-datasheet-97040617.pdf, ComponentLink4Description=https://datasheet.octopart.com/General-Multilayer-Ceramic-Capacitors-Samsung-datasheet-family-111.pdf, ComponentLink4URL=https://datasheet.octopart.com/General-Multilayer-Ceramic-Capacitors-Samsung-datasheet-family-111.pdf, ComponentLink5Description=https://datasheet.octopart.com:443/CL10B472KB8NNNC-Samsung-Electro-Mechanics-datasheet-116051295.pdf?src-supplier=Future+Electronics, ComponentLink5URL=https://datasheet.octopart.com:443/CL10B472KB8NNNC-Samsung-Electro-Mechanics-datasheet-116051295.pdf?src-supplier=Future+Electronics, ComponentLink6Description=https://datasheet.octopart.com:443/CL10B472KB8NNNC-Samsung-Electro-Mechanics-datasheet-81461904.pdf?src-supplier=Future+Electronics, ComponentLink6URL=https://datasheet.octopart.com:443/CL10B472KB8NNNC-Samsung-Electro-Mechanics-datasheet-81461904.pdf?src-supplier=Future+Electronics, ComponentLink7Description=https://datasheet.octopart.com:443/CL10B472KB8NNNC-Samsung-datasheet-26669060.pdf?src-supplier=Future+Electronics, ComponentLink7URL=https://datasheet.octopart.com:443/CL10B472KB8NNNC-Samsung-datasheet-26669060.pdf?src-supplier=Future+Electronics, ComponentLink8Description=https://datasheet.octopart.com:443/CL10B472KB8NNNC-Samsung-Electro-Mechanics-datasheet-149136855.pdf?src-supplier=Future+Electronics, ComponentLink8URL=https://datasheet.octopart.com:443/CL10B472KB8NNNC-Samsung-Electro-Mechanics-datasheet-149136855.pdf?src-supplier=Future+Electronics, ComponentLink9Description=https://datasheet.octopart.com:443/CL10B472KB8NNNC-Samsung-datasheet-37081328.pdf?src-supplier=Future+Electronics, ComponentLink9URL=https://datasheet.octopart.com:443/CL10B472KB8NNNC-Samsung-datasheet-37081328.pdf?src-supplier=Future+Electronics, ComponentLink10Description=https://datasheet.octopart.com:443/CL10B472KB8NNNC-Samsung-datasheet-8326407.pdf?src-supplier=TME, ComponentLink10URL=https://datasheet.octopart.com:443/CL10B472KB8NNNC-Samsung-datasheet-8326407.pdf?src-supplier=TME, ComponentLink11Description=http://sigma.octopart.com:80/rohs_certificate/General-Multilayer-Ceramic-Capacitors-Samsung-family-110.pdf?src-supplier=Compliance+Statements, ComponentLink11URL=http://sigma.octopart.com:80/rohs_certificate/General-Multilayer-Ceramic-Capacitors-Samsung-family-110.pdf?src-supplier=Compliance+Statements, ComponentLink12Description=http://sigma.octopart.com:80/rohs_statement/General-Multilayer-Ceramic-Capacitors-Samsung-family-132.pdf?src-supplier=Compliance+Statements, ComponentLink12URL=http://sigma.octopart.com:80/rohs_statement/General-Multilayer-Ceramic-Capacitors-Samsung-family-132.pdf?src-supplier=Compliance+Statements, ComponentLink13Description=http://sigma.octopart.com:80/reach_statement/General-Multilayer-Ceramic-Capacitors-Samsung-family-133.pdf?src-supplier=Compliance+Statements, ComponentLink13URL=http://sigma.octopart.com:80/reach_statement/General-Multilayer-Ceramic-Capacitors-Samsung-family-133.pdf?src-supplier=Compliance+Statements, ComponentLink14Description=Tedarikçi, ComponentLink14URL=https://www.ozdisan.com/p/smt-smd-ve-mlcc-kapasitorler-184/samsung-cl10b472kb8nnnc-14009, Contact Plating=Tin, Depth=800µm, Height=900µm, Lead Free="Lead Free", Length=1.6mm, Lifecycle Status=Production, Material=Ceramic, Mounting Technology="Surface Mount", Number of Terminals=2, Pricing="1=0,1, 10=0,017, 50=0,017, 100=0,015, 1000=0,009, 10000=0,004 (USD)", Radiation Hardening=No, REACH SVHC=Yes, RoHS=Compliant, Schedule B="8532240020, 8532240020|8532240020, 8532240020|8532240020|8532240020, 8532240020|8532240020|8532240020|8532240020", Stock=124924, Supplier=Mouser, Thickness=889µm, Voltage Rating=50V, Voltage Rating (DC)=50V, Width=800µm
C19: library part "Cap Cer 1nF %10 SMD 0603", "Ceramic Capacitor, Multilayer, Ceramic, 50V, 10% +Tol, 10% -Tol, X7R, +-15% TC, 1nF, Surface Mount, 0603 inch", Case Code (Metric)=1608, Case Code (Imperial)=0603, Dielectric=X7R, Dielectric Material=Ceramic, Manufacturer="Samsung Electro-Mechanics", Manufacturer Part Number=CL10B102KB8NNNC, Max Operating Temperature=125°C, Min Operating Temperature=-55°C, Supplier Part Number=187-CL10B102KB8NNNC, Tolerance=10%, Voltage=50V, Case/Package=0603, Category="Ceramic Capacitors", China RoHS=Compliant, ComponentLink1Description=https://datasheet.octopart.com:443/CL10B102KB8NNNC-Samsung-Electro-Mechanics-datasheet-137699842.pdf?src-supplier=IHS, ComponentLink1URL=https://datasheet.octopart.com:443/CL10B102KB8NNNC-Samsung-Electro-Mechanics-datasheet-137699842.pdf?src-supplier=IHS, ComponentLink2Description=https://datasheet.octopart.com/CL10B102KB8NNNC-Samsung-Electro-Mechanics-datasheet-8324245.pdf, ComponentLink2URL=https://datasheet.octopart.com/CL10B102KB8NNNC-Samsung-Electro-Mechanics-datasheet-8324245.pdf, ComponentLink3Description=https://datasheet.octopart.com/CL10B102KB8NNNC-Samsung-Electro-Mechanics-datasheet-97040617.pdf, ComponentLink3URL=https://datasheet.octopart.com/CL10B102KB8NNNC-Samsung-Electro-Mechanics-datasheet-97040617.pdf, ComponentLink4Description=https://datasheet.octopart.com:443/CL10B102KB8NNNC-Samsung-Electro-Mechanics-datasheet-127092097.pdf?src-supplier=Future+Electronics, ComponentLink4URL=https://datasheet.octopart.com:443/CL10B102KB8NNNC-Samsung-Electro-Mechanics-datasheet-127092097.pdf?src-supplier=Future+Electronics, ComponentLink5Description=https://datasheet.octopart.com:443/CL10B102KB8NNNC-Samsung-Electro-Mechanics-datasheet-81461821.pdf?src-supplier=Future+Electronics, ComponentLink5URL=https://datasheet.octopart.com:443/CL10B102KB8NNNC-Samsung-Electro-Mechanics-datasheet-81461821.pdf?src-supplier=Future+Electronics, ComponentLink6Description=https://datasheet.octopart.com:443/CL10B102KB8NNNC-Samsung-datasheet-44382877.pdf?src-supplier=Future+Electronics, ComponentLink6URL=https://datasheet.octopart.com:443/CL10B102KB8NNNC-Samsung-datasheet-44382877.pdf?src-supplier=Future+Electronics, ComponentLink7Description=https://datasheet.octopart.com:443/CL10B102KB8NNNC-Samsung-datasheet-26589141.pdf?src-supplier=Future+Electronics, ComponentLink7URL=https://datasheet.octopart.com:443/CL10B102KB8NNNC-Samsung-datasheet-26589141.pdf?src-supplier=Future+Electronics, ComponentLink8Description=https://datasheet.octopart.com:443/CL10B102KB8NNNC-Samsung-Electro-Mechanics-datasheet-149158821.pdf?src-supplier=Future+Electronics, ComponentLink8URL=https://datasheet.octopart.com:443/CL10B102KB8NNNC-Samsung-Electro-Mechanics-datasheet-149158821.pdf?src-supplier=Future+Electronics, ComponentLink9Description=https://datasheet.octopart.com:443/CL10B102KB8NNNC-Samsung-datasheet-8326407.pdf?src-supplier=TME, ComponentLink9URL=https://datasheet.octopart.com:443/CL10B102KB8NNNC-Samsung-datasheet-8326407.pdf?src-supplier=TME, ComponentLink10Description=Tedarikçi, ComponentLink10URL=https://www.ozdisan.com/p/smt-smd-ve-mlcc-kapasitorler-184/samsung-cl10b102kb8nnnc-11971, Contact Plating=Tin, Depth=800µm, Height=900µm, Lead Free="Lead Free", Length=1.6mm, Lifecycle Status=Production, Material=Ceramic, Mounting Technology="Surface Mount", Number of Terminals=2, Pricing="1=0,1, 10=0,004, 50=0,004, 100=0,004, 1000=0,004, 10000=0,004 (USD)", Radiation Hardening=No, REACH SVHC=Yes, RoHS=Compliant, Schedule B="8532240020, 8532240020|8532240020, 8532240020|8532240020|8532240020, 8532240020|8532240020|8532240020|8532240020", Stock=423929, Supplier=Mouser, Thickness=889µm, Voltage Rating=50V, Voltage Rating (DC)=50V, Width=800µm